# Altium PCB DUTBoard_Sandbox.PcbDoc (part 5 of 6)
Units mil, origin at the board's own origin, x right, y up, seen from the top; angles counter-clockwise.
Board outline 5475 x 5475 mil, 4 copper layers (Top Layer, Mid-Layer 1, Mid-Layer 2, Bottom Layer); 89 components, 507 nets, 1705 pads, 1204 vias.
Unrouted connection lines stored in the file: 6.
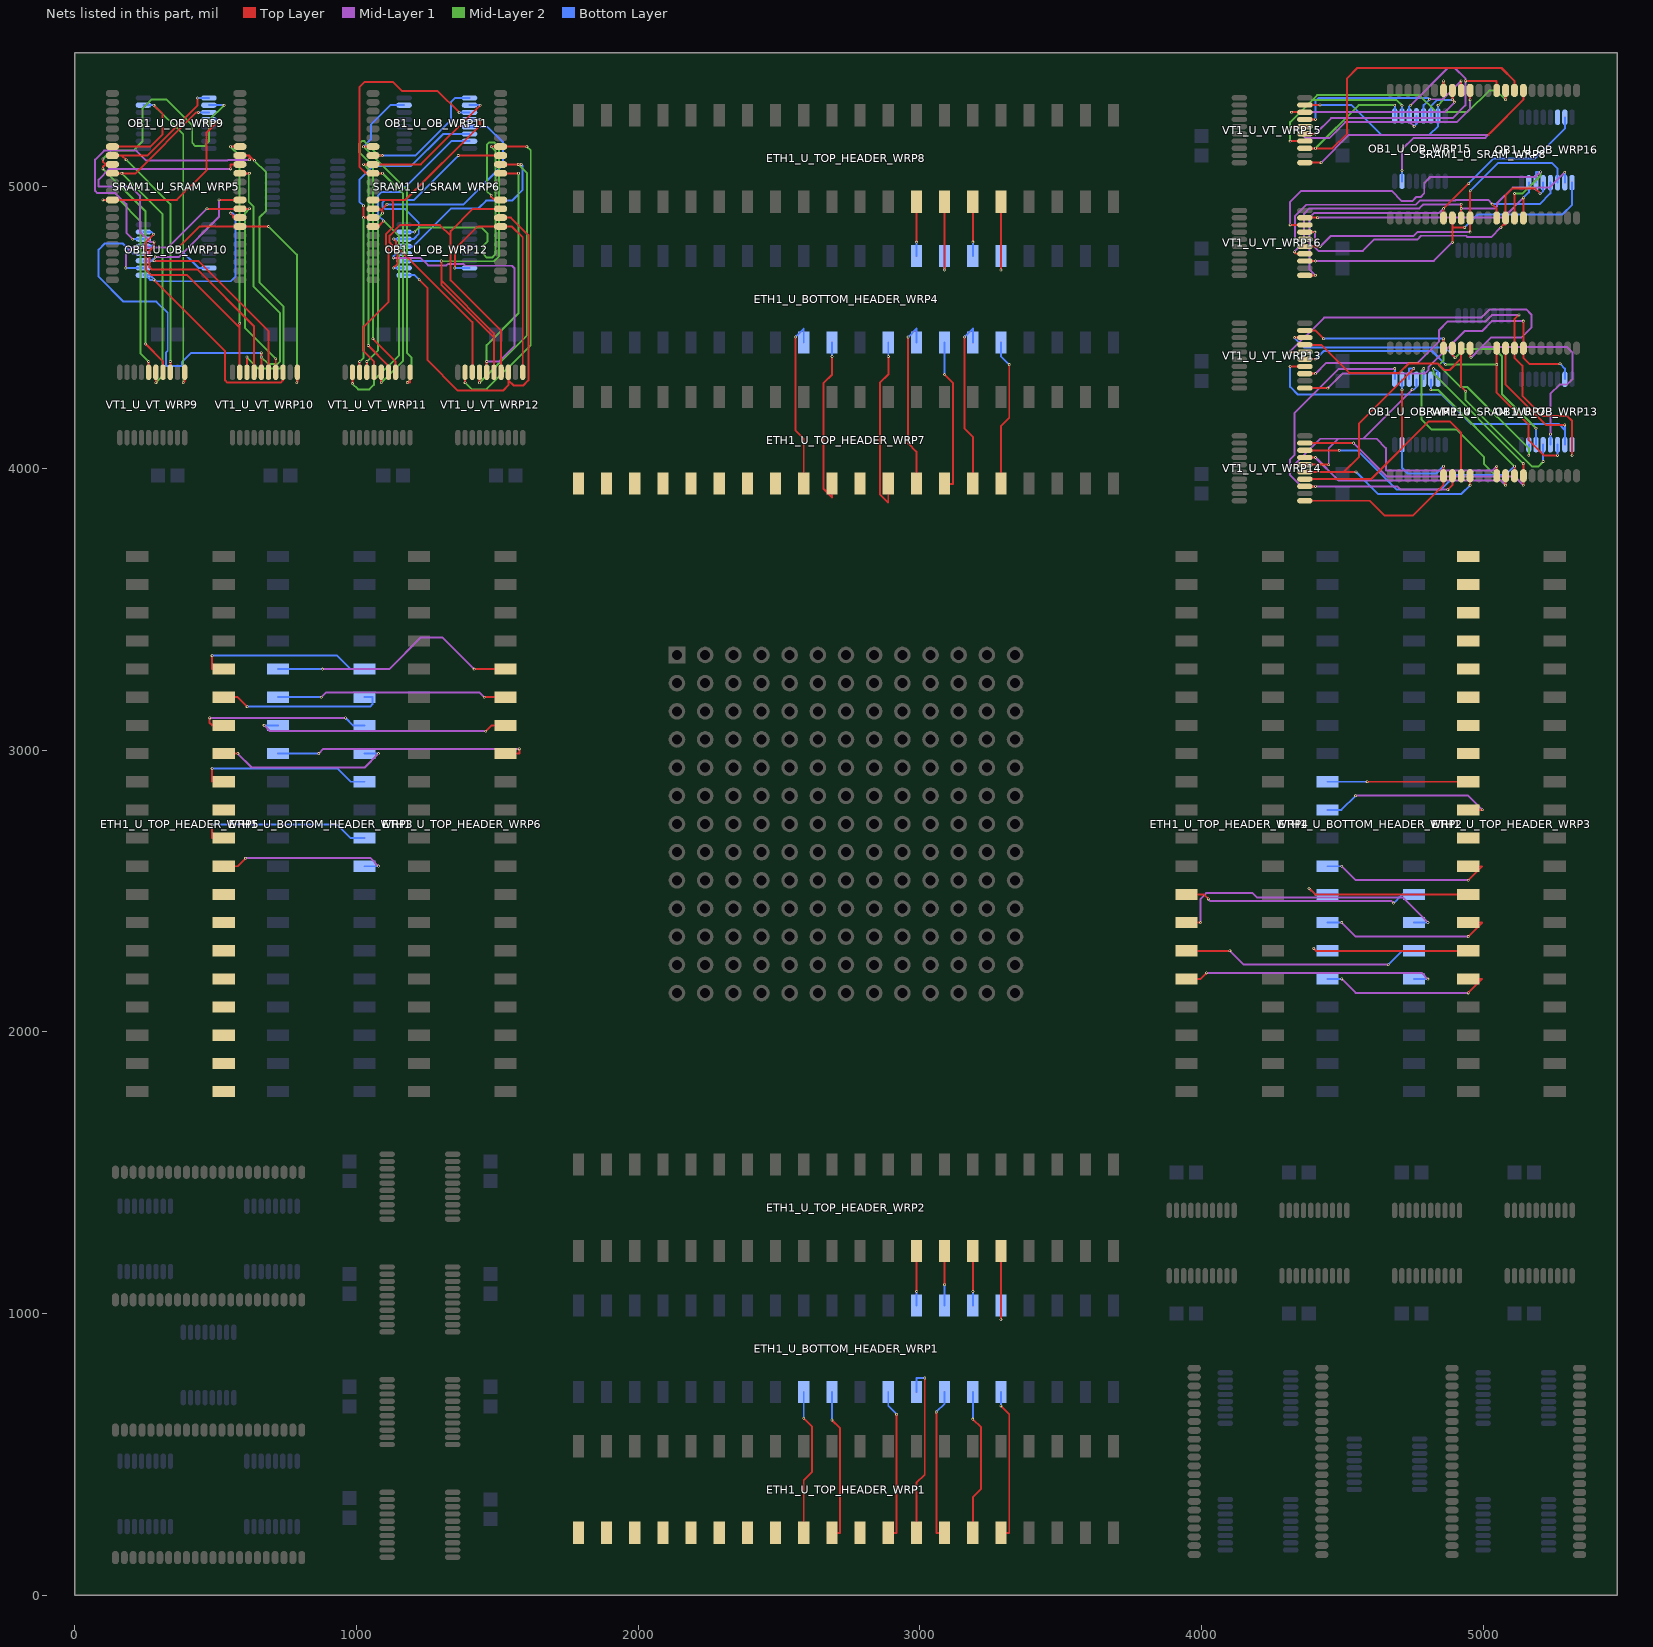
[diagram p7: the nets of this part, all layers, seen from the top]

## Via types
v1: diameter 10, hole 5, Top Layer to Bottom Layer, 1204 vias

## Nets (pads, with @x,y where several pads share a name; then routed paths per layer and width w, separated by ;. In a path a pad name is that pad's centre, name@x,y a point inside that pad or via, vN(x,y) a via of type N, cw(c..) or ccw(c..) an arc to the next point about the centre after c; other vN are vias at no path point) (continued)
INTERNAL12_U_COMBINED_HEADER_WRP1: ETH1_U_BOTTOM_HEADER_WRP1.13 ETH1_U_TOP_HEADER_WRP2.13 | length 193.3
  Top Layer w7: ETH1_U_TOP_HEADER_WRP2.13@2987.5,1221.46 2987.5,1078.5 v1(2988,1078)
  Bottom Layer w7: ETH1_U_BOTTOM_HEADER_WRP1.13@2987.5,1028.54 2987.5,1077.5 v1(2988,1078)
INTERNAL12_U_COMBINED_HEADER_WRP2: ETH1_U_BOTTOM_HEADER_WRP2.13 ETH1_U_TOP_HEADER_WRP4.13 | length 832.6
  Top Layer w7: ETH1_U_TOP_HEADER_WRP4.13@3946.46,2487.5 4007,2487.5 v1(4023,2471.5)
  Mid-Layer 1 w7: v1(4023,2471.5) 4030.5,2464 4674,2464 v1(4681.25,2456.75)
  Bottom Layer w7: v1(4681.25,2456.75) 4712,2487.5 ETH1_U_BOTTOM_HEADER_WRP2.13@4753.54,2487.5
INTERNAL12_U_COMBINED_HEADER_WRP3: ETH1_U_BOTTOM_HEADER_WRP3.13 ETH1_U_TOP_HEADER_WRP6.13 | length 929
  Top Layer w7: ETH1_U_TOP_HEADER_WRP6.13@1528.54,2987.5 1577.5,2987.5 1578,2988 v1(1578,3004)
  Mid-Layer 1 w7: v1(866,2987.5) 882.5,3004 v1(1578,3004)
  Bottom Layer w7: ETH1_U_BOTTOM_HEADER_WRP3.13@721.46,2987.5 v1(866,2987.5)
INTERNAL12_U_COMBINED_HEADER_WRP4: ETH1_U_BOTTOM_HEADER_WRP4.13 ETH1_U_TOP_HEADER_WRP8.13 | length 193.3
  Top Layer w7: ETH1_U_TOP_HEADER_WRP8.13@2987.5,4946.46 2987.5,4803.5 v1(2988,4803)
  Bottom Layer w7: ETH1_U_BOTTOM_HEADER_WRP4.13@2987.5,4753.54 2987.5,4802.5 v1(2988,4803)
INTERNAL13_U_COMBINED_HEADER_WRP1: ETH1_U_BOTTOM_HEADER_WRP1.14 ETH1_U_TOP_HEADER_WRP2.14 | length 192.9
  Top Layer w7: v1(3087.5,1102) ETH1_U_TOP_HEADER_WRP2.14@3087.5,1221.46
  Bottom Layer w7: ETH1_U_BOTTOM_HEADER_WRP1.14@3087.5,1028.54 v1(3087.5,1102)
INTERNAL13_U_COMBINED_HEADER_WRP2: ETH1_U_BOTTOM_HEADER_WRP2.14 ETH1_U_TOP_HEADER_WRP4.14 | length 1042.1
  Top Layer w7: ETH1_U_TOP_HEADER_WRP4.14@3946.46,2387.5 v1(3996,2387.5)
  Mid-Layer 1 w7: v1(3996,2387.5) 3996,2472 4016,2492 4181,2492 4196,2477 4714,2477 v1(4803,2388)
  Bottom Layer w7: ETH1_U_BOTTOM_HEADER_WRP2.14@4753.54,2387.5 4802.5,2387.5 v1(4803,2388)
INTERNAL13_U_COMBINED_HEADER_WRP3: ETH1_U_BOTTOM_HEADER_WRP3.14 ETH1_U_TOP_HEADER_WRP6.14 | length 923.4
  Top Layer w7: v1(1459,3067) 1479.5,3087.5 ETH1_U_TOP_HEADER_WRP6.14@1528.54,3087.5
  Mid-Layer 1 w7: v1(672,3088) 693,3067 v1(1459,3067)
  Bottom Layer w7: v1(672,3088) 672.5,3087.5 ETH1_U_BOTTOM_HEADER_WRP3.14@721.46,3087.5
INTERNAL13_U_COMBINED_HEADER_WRP4: ETH1_U_BOTTOM_HEADER_WRP4.14 ETH1_U_TOP_HEADER_WRP8.14 | length 292
  Top Layer w7: v1(3087.5,4704) ETH1_U_TOP_HEADER_WRP8.14@3087.5,4946.46
  Bottom Layer w7: v1(3087.5,4704) ETH1_U_BOTTOM_HEADER_WRP4.14@3087.5,4753.54
INTERNAL14_U_COMBINED_HEADER_WRP1: ETH1_U_BOTTOM_HEADER_WRP1.15 ETH1_U_TOP_HEADER_WRP2.15 | length 193.3
  Top Layer w7: ETH1_U_TOP_HEADER_WRP2.15@3187.5,1221.46 3187.5,1078.5 v1(3188,1078)
  Bottom Layer w7: ETH1_U_BOTTOM_HEADER_WRP1.15@3187.5,1028.54 3187.5,1077.5 v1(3188,1078)
INTERNAL14_U_COMBINED_HEADER_WRP2: ETH1_U_BOTTOM_HEADER_WRP2.15 ETH1_U_TOP_HEADER_WRP4.15 | length 848.1
  Top Layer w7: ETH1_U_TOP_HEADER_WRP4.15@3946.46,2287.5 v1(4100,2287.5)
  Mid-Layer 1 w7: v1(4100,2287.5) 4149.5,2238 v1(4662.5,2238)
  Bottom Layer w7: v1(4662.5,2238) 4712,2287.5 ETH1_U_BOTTOM_HEADER_WRP2.15@4753.54,2287.5
INTERNAL14_U_COMBINED_HEADER_WRP3: ETH1_U_BOTTOM_HEADER_WRP3.15 ETH1_U_TOP_HEADER_WRP6.15 | length 820.8
  Top Layer w7: v1(1453.5,3187.5) ETH1_U_TOP_HEADER_WRP6.15@1528.54,3187.5
  Mid-Layer 1 w7: v1(875,3187.5) 891.5,3204 1437,3204 v1(1453.5,3187.5)
  Bottom Layer w7: ETH1_U_BOTTOM_HEADER_WRP3.15@721.46,3187.5 v1(875,3187.5)
INTERNAL14_U_COMBINED_HEADER_WRP4: ETH1_U_BOTTOM_HEADER_WRP4.15 ETH1_U_TOP_HEADER_WRP8.15 | length 193.3
  Top Layer w7: ETH1_U_TOP_HEADER_WRP8.15@3187.5,4946.46 3187.5,4803.5 v1(3188,4803)
  Bottom Layer w7: ETH1_U_BOTTOM_HEADER_WRP4.15@3187.5,4753.54 3187.5,4802.5 v1(3188,4803)
INTERNAL15_U_COMBINED_HEADER_WRP1: ETH1_U_BOTTOM_HEADER_WRP1.16 ETH1_U_TOP_HEADER_WRP2.16 | length 292
  Top Layer w7: v1(3287.5,979) ETH1_U_TOP_HEADER_WRP2.16@3287.5,1221.46
  Bottom Layer w7: v1(3287.5,979) ETH1_U_BOTTOM_HEADER_WRP1.16@3287.5,1028.54
INTERNAL15_U_COMBINED_HEADER_WRP2: ETH1_U_BOTTOM_HEADER_WRP2.16 ETH1_U_TOP_HEADER_WRP4.16 | length 924.2
  Top Layer w7: ETH1_U_TOP_HEADER_WRP4.16@3946.46,2187.5 3996,2187.5 v1(4017.5,2209)
  Mid-Layer 1 w7: v1(4017.5,2209) 4781,2209 v1(4803,2187)
  Bottom Layer w7: ETH1_U_BOTTOM_HEADER_WRP2.16@4753.54,2187.5 4802.5,2187.5 v1(4803,2187)
INTERNAL15_U_COMBINED_HEADER_WRP3: ETH1_U_BOTTOM_HEADER_WRP3.16 ETH1_U_TOP_HEADER_WRP6.16 | length 900.3
  Top Layer w7: v1(1417.5,3287.5) ETH1_U_TOP_HEADER_WRP6.16@1528.54,3287.5
  Mid-Layer 1 w7: v1(879,3287.5) 1116.5,3287.5 1229,3400 1305,3400 v1(1417.5,3287.5)
  Bottom Layer w7: ETH1_U_BOTTOM_HEADER_WRP3.16@721.46,3287.5 v1(879,3287.5)
INTERNAL15_U_COMBINED_HEADER_WRP4: ETH1_U_BOTTOM_HEADER_WRP4.16 ETH1_U_TOP_HEADER_WRP8.16 | length 292
  Top Layer w7: v1(3287.5,4704) ETH1_U_TOP_HEADER_WRP8.16@3287.5,4946.46
  Bottom Layer w7: v1(3287.5,4704) ETH1_U_BOTTOM_HEADER_WRP4.16@3287.5,4753.54
INTERNAL16_U_COMBINED_HEADER_WRP1: ETH1_U_TOP_HEADER_WRP1.1
INTERNAL16_U_COMBINED_HEADER_WRP2: ETH1_U_TOP_HEADER_WRP3.1
INTERNAL16_U_COMBINED_HEADER_WRP3: ETH1_U_TOP_HEADER_WRP5.1
INTERNAL16_U_COMBINED_HEADER_WRP4: ETH1_U_TOP_HEADER_WRP7.1
INTERNAL17_U_COMBINED_HEADER_WRP1: ETH1_U_TOP_HEADER_WRP1.2
INTERNAL17_U_COMBINED_HEADER_WRP2: ETH1_U_TOP_HEADER_WRP3.2
INTERNAL17_U_COMBINED_HEADER_WRP3: ETH1_U_TOP_HEADER_WRP5.2
INTERNAL17_U_COMBINED_HEADER_WRP4: ETH1_U_TOP_HEADER_WRP7.2
INTERNAL18_U_COMBINED_HEADER_WRP1: ETH1_U_TOP_HEADER_WRP1.3
INTERNAL18_U_COMBINED_HEADER_WRP2: ETH1_U_TOP_HEADER_WRP3.3
INTERNAL18_U_COMBINED_HEADER_WRP3: ETH1_U_TOP_HEADER_WRP5.3
INTERNAL18_U_COMBINED_HEADER_WRP4: ETH1_U_TOP_HEADER_WRP7.3
INTERNAL19_U_COMBINED_HEADER_WRP1: ETH1_U_TOP_HEADER_WRP1.4
INTERNAL19_U_COMBINED_HEADER_WRP2: ETH1_U_TOP_HEADER_WRP3.4
INTERNAL19_U_COMBINED_HEADER_WRP3: ETH1_U_TOP_HEADER_WRP5.4
INTERNAL19_U_COMBINED_HEADER_WRP4: ETH1_U_TOP_HEADER_WRP7.4
INTERNAL20_U_COMBINED_HEADER_WRP1: ETH1_U_TOP_HEADER_WRP1.5
INTERNAL20_U_COMBINED_HEADER_WRP2: ETH1_U_TOP_HEADER_WRP3.5
INTERNAL20_U_COMBINED_HEADER_WRP3: ETH1_U_TOP_HEADER_WRP5.5
INTERNAL20_U_COMBINED_HEADER_WRP4: ETH1_U_TOP_HEADER_WRP7.5
INTERNAL21_U_COMBINED_HEADER_WRP1: ETH1_U_TOP_HEADER_WRP1.6
INTERNAL21_U_COMBINED_HEADER_WRP2: ETH1_U_TOP_HEADER_WRP3.6
INTERNAL21_U_COMBINED_HEADER_WRP3: ETH1_U_TOP_HEADER_WRP5.6
INTERNAL21_U_COMBINED_HEADER_WRP4: ETH1_U_TOP_HEADER_WRP7.6
INTERNAL22_U_COMBINED_HEADER_WRP1: ETH1_U_TOP_HEADER_WRP1.7
INTERNAL22_U_COMBINED_HEADER_WRP2: ETH1_U_TOP_HEADER_WRP3.7
INTERNAL22_U_COMBINED_HEADER_WRP3: ETH1_U_TOP_HEADER_WRP5.7
INTERNAL22_U_COMBINED_HEADER_WRP4: ETH1_U_TOP_HEADER_WRP7.7
INTERNAL23_U_COMBINED_HEADER_WRP1: ETH1_U_TOP_HEADER_WRP1.8
INTERNAL23_U_COMBINED_HEADER_WRP2: ETH1_U_TOP_HEADER_WRP3.8
INTERNAL23_U_COMBINED_HEADER_WRP3: ETH1_U_TOP_HEADER_WRP5.8
INTERNAL23_U_COMBINED_HEADER_WRP4: ETH1_U_TOP_HEADER_WRP7.8
INTERNAL24_U_COMBINED_HEADER_WRP1: ETH1_U_BOTTOM_HEADER_WRP1.32 ETH1_U_TOP_HEADER_WRP1.9 | length 524.4
  Top Layer w7: ETH1_U_TOP_HEADER_WRP1.9@2587.5,221.46 2587.5,408.5 2617,438 2617,598.5 v1(2587.5,628)
  Bottom Layer w7: v1(2587.5,628) ETH1_U_BOTTOM_HEADER_WRP1.32@2587.5,721.46
INTERNAL24_U_COMBINED_HEADER_WRP2: ETH1_U_BOTTOM_HEADER_WRP2.32 ETH1_U_TOP_HEADER_WRP3.9 | length 500
  Top Layer w7: v1(4587,2887.5) ETH1_U_TOP_HEADER_WRP3.9@4946.46,2887.5
  Bottom Layer w7: ETH1_U_BOTTOM_HEADER_WRP2.32@4446.46,2887.5 v1(4587,2887.5)
INTERNAL24_U_COMBINED_HEADER_WRP3: ETH1_U_BOTTOM_HEADER_WRP3.32 ETH1_U_TOP_HEADER_WRP5.9 | length 622.5
  Top Layer w7: ETH1_U_TOP_HEADER_WRP5.9@528.54,2587.5 578,2587.5 v1(606.5,2616)
  Mid-Layer 1 w7: v1(606.5,2616) 1050,2616 v1(1078,2588)
  Bottom Layer w7: ETH1_U_BOTTOM_HEADER_WRP3.32@1028.54,2587.5 1077.5,2587.5 v1(1078,2588)
INTERNAL24_U_COMBINED_HEADER_WRP4: ETH1_U_BOTTOM_HEADER_WRP4.32 ETH1_U_TOP_HEADER_WRP7.9 | length 622.5
  Top Layer w7: v1(2558,4466) 2558,4134.5 2587.5,4105 ETH1_U_TOP_HEADER_WRP7.9@2587.5,3946.46
  Bottom Layer w7: v1(2558,4466) 2587.5,4495.5 ETH1_U_BOTTOM_HEADER_WRP4.32@2587.5,4446.46
INTERNAL25_U_COMBINED_HEADER_WRP1: ETH1_U_BOTTOM_HEADER_WRP1.31 ETH1_U_TOP_HEADER_WRP1.10 | length 542.6
  Top Layer w7: ETH1_U_TOP_HEADER_WRP1.10@2687.5,221.46 2687.5,221 2717,221 2717,592.5 v1(2687.5,622)
  Bottom Layer w7: v1(2687.5,622) ETH1_U_BOTTOM_HEADER_WRP1.31@2687.5,721.46
INTERNAL25_U_COMBINED_HEADER_WRP2: ETH1_U_BOTTOM_HEADER_WRP2.31 ETH1_U_TOP_HEADER_WRP3.10 | length 640.9
  Top Layer w7: ETH1_U_TOP_HEADER_WRP3.10@4946.46,2787.5 4995.5,2787.5 v1(4996,2788)
  Mid-Layer 1 w7: v1(4546.5,2838) 4946,2838 v1(4996,2788)
  Bottom Layer w7: ETH1_U_BOTTOM_HEADER_WRP2.31@4446.46,2787.5 4496,2787.5 v1(4546.5,2838)
INTERNAL25_U_COMBINED_HEADER_WRP3: ETH1_U_BOTTOM_HEADER_WRP3.31 ETH1_U_TOP_HEADER_WRP5.10 | length 649.3
  Top Layer w7: v1(487.5,2735) 487.5,2687.5 ETH1_U_TOP_HEADER_WRP5.10@528.54,2687.5
  Bottom Layer w7: v1(487.5,2735) 931.5,2735 979,2687.5 ETH1_U_BOTTOM_HEADER_WRP3.31@1028.54,2687.5
INTERNAL25_U_COMBINED_HEADER_WRP4: ETH1_U_BOTTOM_HEADER_WRP4.31 ETH1_U_TOP_HEADER_WRP7.10 | length 623.6
  Top Layer w7: ETH1_U_TOP_HEADER_WRP7.10@2687.5,3946.46 2687.5,3897.09 2658,3926.59 2658,4303 2688,4333 v1(2688,4397)
  Bottom Layer w7: ETH1_U_BOTTOM_HEADER_WRP4.31@2687.5,4446.46 2687.5,4397.5 v1(2688,4397)
INTERNAL26_U_COMBINED_HEADER_WRP1: ETH1_U_TOP_HEADER_WRP1.11
INTERNAL26_U_COMBINED_HEADER_WRP2: ETH1_U_TOP_HEADER_WRP3.11
INTERNAL26_U_COMBINED_HEADER_WRP3: ETH1_U_TOP_HEADER_WRP5.11
INTERNAL26_U_COMBINED_HEADER_WRP4: ETH1_U_TOP_HEADER_WRP7.11
INTERNAL27_U_COMBINED_HEADER_WRP1: ETH1_U_BOTTOM_HEADER_WRP1.29 ETH1_U_TOP_HEADER_WRP1.12 | length 542.6
  Top Layer w7: ETH1_U_TOP_HEADER_WRP1.12@2887.5,221.46 2887.5,221 2917,221 v1(2917,642.5)
  Bottom Layer w7: ETH1_U_BOTTOM_HEADER_WRP1.29@2887.5,721.46 2887.5,672 v1(2917,642.5)
INTERNAL27_U_COMBINED_HEADER_WRP2: ETH1_U_BOTTOM_HEADER_WRP2.29 ETH1_U_TOP_HEADER_WRP3.12 | length 639.1
  Top Layer w7: v1(4946,2538) 4995.5,2587.5 ETH1_U_TOP_HEADER_WRP3.12@4946.46,2587.5
  Mid-Layer 1 w7: v1(4497,2587.5) 4546.5,2538 v1(4946,2538)
  Bottom Layer w7: ETH1_U_BOTTOM_HEADER_WRP2.29@4446.46,2587.5 v1(4497,2587.5)
INTERNAL27_U_COMBINED_HEADER_WRP3: ETH1_U_BOTTOM_HEADER_WRP3.29 ETH1_U_TOP_HEADER_WRP5.12 | length 649.3
  Top Layer w7: v1(487.5,2935) 487.5,2887.5 ETH1_U_TOP_HEADER_WRP5.12@528.54,2887.5
  Bottom Layer w7: v1(487.5,2935) 931.5,2935 979,2887.5 ETH1_U_BOTTOM_HEADER_WRP3.29@1028.54,2887.5
INTERNAL27_U_COMBINED_HEADER_WRP4: ETH1_U_BOTTOM_HEADER_WRP4.29 ETH1_U_TOP_HEADER_WRP7.12 | length 661.6
  Top Layer w7: ETH1_U_TOP_HEADER_WRP7.12@2887.5,3946.46 2887.5,3878.09 2858,3907.59 2858,4303 2888,4333 v1(2888,4397)
  Bottom Layer w7: ETH1_U_BOTTOM_HEADER_WRP4.29@2887.5,4446.46 2887.5,4397.5 v1(2888,4397)
INTERNAL28_U_COMBINED_HEADER_WRP1: ETH1_U_BOTTOM_HEADER_WRP1.28 ETH1_U_TOP_HEADER_WRP1.13 | length 640.8
  Top Layer w7: ETH1_U_TOP_HEADER_WRP1.13@2987.5,221.46 2987.5,398.5 3017,428 v1(3017,771)
  Bottom Layer w7: ETH1_U_BOTTOM_HEADER_WRP1.28@2987.5,721.46 2987.5,771 v1(3017,771)
INTERNAL28_U_COMBINED_HEADER_WRP2: ETH1_U_BOTTOM_HEADER_WRP2.28 ETH1_U_TOP_HEADER_WRP3.13 | length 648.7
  Top Layer w7: v1(4381,2509) 4402.5,2487.5 ETH1_U_TOP_HEADER_WRP3.13@4946.46,2487.5
  Bottom Layer w7: v1(4381,2509) 4402.5,2487.5 ETH1_U_BOTTOM_HEADER_WRP2.28@4446.46,2487.5
INTERNAL28_U_COMBINED_HEADER_WRP3: ETH1_U_BOTTOM_HEADER_WRP3.28 ETH1_U_TOP_HEADER_WRP5.13 | length 639.9
  Top Layer w7: ETH1_U_TOP_HEADER_WRP5.13@528.54,2987.5 v1(579,2987.5)
  Mid-Layer 1 w7: v1(579,2987.5) 628.5,2938 1028.5,2938 v1(1078,2987.5)
  Bottom Layer w7: ETH1_U_BOTTOM_HEADER_WRP3.28@1028.54,2987.5 v1(1078,2987.5)
INTERNAL28_U_COMBINED_HEADER_WRP4: ETH1_U_BOTTOM_HEADER_WRP4.28 ETH1_U_TOP_HEADER_WRP7.13 | length 622.5
  Top Layer w7: v1(2958,4466) 2958,4088.5 2987.5,4059 ETH1_U_TOP_HEADER_WRP7.13@2987.5,3946.46
  Bottom Layer w7: v1(2958,4466) 2987.5,4495.5 ETH1_U_BOTTOM_HEADER_WRP4.28@2987.5,4446.46
INTERNAL29_U_COMBINED_HEADER_WRP1: ETH1_U_BOTTOM_HEADER_WRP1.27 ETH1_U_TOP_HEADER_WRP1.14 | length 542.6
  Top Layer w7: v1(3058,650.5) 3058,221 3087.5,221 ETH1_U_TOP_HEADER_WRP1.14@3087.5,221.46
  Bottom Layer w7: v1(3058,650.5) 3087.5,680 ETH1_U_BOTTOM_HEADER_WRP1.27@3087.5,721.46
INTERNAL29_U_COMBINED_HEADER_WRP2: ETH1_U_BOTTOM_HEADER_WRP2.27 ETH1_U_TOP_HEADER_WRP3.14 | length 639.1
  Top Layer w7: v1(4946,2338) 4995.5,2387.5 ETH1_U_TOP_HEADER_WRP3.14@4946.46,2387.5
  Mid-Layer 1 w7: v1(4497,2387.5) 4546.5,2338 v1(4946,2338)
  Bottom Layer w7: ETH1_U_BOTTOM_HEADER_WRP2.27@4446.46,2387.5 v1(4497,2387.5)
INTERNAL29_U_COMBINED_HEADER_WRP3: ETH1_U_BOTTOM_HEADER_WRP3.27 ETH1_U_TOP_HEADER_WRP5.14 | length 631.6
  Top Layer w7: v1(479,3114) 479,3096 487.5,3087.5 ETH1_U_TOP_HEADER_WRP5.14@528.54,3087.5
  Mid-Layer 1 w7: v1(479,3114) v1(961,3114)
  Bottom Layer w7: v1(961,3114) 987.5,3087.5 ETH1_U_BOTTOM_HEADER_WRP3.27@1028.54,3087.5
INTERNAL29_U_COMBINED_HEADER_WRP4: ETH1_U_BOTTOM_HEADER_WRP4.27 ETH1_U_TOP_HEADER_WRP7.14 | length 544.4
  Top Layer w7: ETH1_U_TOP_HEADER_WRP7.14@3087.5,3946.46 3087.5,3945.14 3117,3945.14 3117,4303 v1(3087.5,4332.5)
  Bottom Layer w7: v1(3087.5,4332.5) ETH1_U_BOTTOM_HEADER_WRP4.27@3087.5,4446.46
INTERNAL30_U_COMBINED_HEADER_WRP1: ETH1_U_BOTTOM_HEADER_WRP1.26 ETH1_U_TOP_HEADER_WRP1.15 | length 524.4
  Top Layer w7: ETH1_U_TOP_HEADER_WRP1.15@3187.5,221.46 3187.5,348.5 3217,378 3217,595.5 v1(3187.5,625)
  Bottom Layer w7: v1(3187.5,625) ETH1_U_BOTTOM_HEADER_WRP1.26@3187.5,721.46
INTERNAL30_U_COMBINED_HEADER_WRP2: ETH1_U_BOTTOM_HEADER_WRP2.26 ETH1_U_TOP_HEADER_WRP3.15 | length 605
  Top Layer w7: v1(4397.5,2296) 4406,2287.5 ETH1_U_TOP_HEADER_WRP3.15@4946.46,2287.5
  Bottom Layer w7: v1(4397.5,2296) 4406,2287.5 ETH1_U_BOTTOM_HEADER_WRP2.26@4446.46,2287.5
INTERNAL30_U_COMBINED_HEADER_WRP3: ETH1_U_BOTTOM_HEADER_WRP3.26 ETH1_U_TOP_HEADER_WRP5.15 | length 597.6
  Top Layer w7: ETH1_U_TOP_HEADER_WRP5.15@528.54,3187.5 578,3187.5 v1(611.5,3154)
  Bottom Layer w7: v1(611.5,3154) 1048,3154 1056,3162 1056,3187.5 ETH1_U_BOTTOM_HEADER_WRP3.26@1028.54,3187.5
INTERNAL30_U_COMBINED_HEADER_WRP4: ETH1_U_BOTTOM_HEADER_WRP4.26 ETH1_U_TOP_HEADER_WRP7.15 | length 622.5
  Top Layer w7: v1(3158,4466) 3158,4141.5 3187.5,4112 ETH1_U_TOP_HEADER_WRP7.15@3187.5,3946.46
  Bottom Layer w7: v1(3158,4466) 3187.5,4495.5 ETH1_U_BOTTOM_HEADER_WRP4.26@3187.5,4446.46
INTERNAL31_U_COMBINED_HEADER_WRP1: ETH1_U_BOTTOM_HEADER_WRP1.25 ETH1_U_TOP_HEADER_WRP1.16 | length 542.6
  Top Layer w7: ETH1_U_TOP_HEADER_WRP1.16@3287.5,221.46 3287.5,221 3317,221 3317,642.5 v1(3287.5,672)
  Bottom Layer w7: v1(3287.5,672) ETH1_U_BOTTOM_HEADER_WRP1.25@3287.5,721.46
INTERNAL31_U_COMBINED_HEADER_WRP2: ETH1_U_BOTTOM_HEADER_WRP2.25 ETH1_U_TOP_HEADER_WRP3.16 | length 639.1
  Top Layer w7: v1(4946,2138) 4995.5,2187.5 ETH1_U_TOP_HEADER_WRP3.16@4946.46,2187.5
  Mid-Layer 1 w7: v1(4497,2187.5) 4546.5,2138 v1(4946,2138)
  Bottom Layer w7: ETH1_U_BOTTOM_HEADER_WRP2.25@4446.46,2187.5 v1(4497,2187.5)
INTERNAL31_U_COMBINED_HEADER_WRP3: ETH1_U_BOTTOM_HEADER_WRP3.25 ETH1_U_TOP_HEADER_WRP5.16 | length 649.3
  Top Layer w7: v1(487.5,3335) 487.5,3287.5 ETH1_U_TOP_HEADER_WRP5.16@528.54,3287.5
  Bottom Layer w7: v1(487.5,3335) 931.5,3335 979,3287.5 ETH1_U_BOTTOM_HEADER_WRP3.25@1028.54,3287.5
INTERNAL31_U_COMBINED_HEADER_WRP4: ETH1_U_BOTTOM_HEADER_WRP4.25 ETH1_U_TOP_HEADER_WRP7.16 | length 524.4
  Top Layer w7: ETH1_U_TOP_HEADER_WRP7.16@3287.5,3946.46 3287.5,4149.5 3317,4179 v1(3317,4368)
  Bottom Layer w7: ETH1_U_BOTTOM_HEADER_WRP4.25@3287.5,4446.46 3287.5,4397.5 v1(3317,4368)
NetOB1_U_OB_WRP16_DS: OB1_U_OB_WRP16.DS
OB_D_B0: OB1_U_OB_WRP16.D0 SRAM1_U_SRAM_WRP8.DATA0 VT1_U_VT_WRP16.OVL0 | length 1361.3
  Top Layer w7: VT1_U_VT_WRP16.OVL0@4366.14,4684.84 4403.68,4684.84 v1(4403.84,4685) ; SRAM1_U_SRAM_WRP8.DATA0@4858.27,4888.62 v1(4858.27,4922) v1(4948,5011.46)
  Mid-Layer 1 w7: v1(4403.84,4685) 4383.49,4705.36 4383.49,4890.49 4400,4907 4843.27,4907 v1(4858.27,4922)
  Bottom Layer w7: v1(4948,5011.46) 5035.54,5099 5181.98,5099 5288.98,5206 OB1_U_OB_WRP16.D0@5288.98,5246.14
OB_D_B1: OB1_U_OB_WRP16.D1 SRAM1_U_SRAM_WRP8.DATA1 VT1_U_VT_WRP16.OVL1 | length 1173.9
  Top Layer w7: VT1_U_VT_WRP16.OVL1@4366.14,4736.02 v1(4404,4736.02) ; v1(4889.76,4802) 4889.76,4855.24 ; SRAM1_U_SRAM_WRP8.DATA1@4889.76,4888.62 4889.76,4855.24 ; v1(4933.84,4855) 4890,4855 4889.76,4855.24
  Mid-Layer 1 w7: v1(4404,4736.02) 4823.79,4736.02 v1(4889.76,4802)
  Bottom Layer w7: v1(4933.84,4855) 4979.84,4901 5279.57,4901 5314.57,4936 OB1_U_OB_WRP16.D1@5314.57,5013.86
OB_D_B2: OB1_U_OB_WRP16.D2 SRAM1_U_SRAM_WRP8.DATA2 VT1_U_VT_WRP16.OVL2 | length 1273.8
  Top Layer w7: v1(4329,4768) 4335.39,4761.61 VT1_U_VT_WRP16.OVL2@4366.14,4761.61 ; SRAM1_U_SRAM_WRP8.DATA2@4921.26,4888.62 v1(4921.26,4922) v1(4921.26,4937)
  Mid-Layer 1 w7: v1(4329,4768) 4364,4803 4364,4904 4382.5,4922.5 4772.78,4922.5 4787.28,4937 v1(4921.26,4937) ; v1(4921.26,4922) 5040,4922 5048,4930 5048,4940 5104,4996 5234,4996 v1(5289,5051)
  Bottom Layer w7: OB1_U_OB_WRP16.D2@5288.98,5013.86 v1(5289,5051)
OB_D_B3: OB1_U_OB_WRP16.D3 SRAM1_U_SRAM_WRP8.DATA3 VT1_U_VT_WRP16.OVL3 | length 1163.5
  Top Layer w7: VT1_U_VT_WRP16.OVL3@4366.14,4787.2 v1(4420,4787.2) ; v1(4952.76,4838.5) SRAM1_U_SRAM_WRP8.DATA3@4952.76,4888.62 4952.76,4984.76 v1(4953,4985)
  Mid-Layer 1 w7: v1(4420,4787.2) 4457.3,4824.5 4751.5,4824.5 4765.5,4838.5 v1(4952.76,4838.5)
  Bottom Layer w7: v1(4953,4985) 5051,5083 5244.39,5083 5263.39,5064 OB1_U_OB_WRP16.D3@5263.39,5013.86
OB_D_B4: OB1_U_OB_WRP16.D4 SRAM1_U_SRAM_WRP8.DATA4 VT1_U_VT_WRP16.OVL4 | length 1164.2
  Top Layer w7: v1(4330.43,4814.43) 4332.06,4812.8 VT1_U_VT_WRP16.OVL4@4366.14,4812.8 ; v1(5031,4938) 5047.24,4921.76 SRAM1_U_SRAM_WRP8.DATA4@5047.24,4888.62
  Mid-Layer 1 w7: v1(4330.43,4814.43) 4330.43,4895.43 4370.5,4935.5 4759.78,4935.5 4774.28,4950 4900.07,4950 4902.57,4952.5 5016.5,4952.5 v1(5031,4938)
  Bottom Layer w7: v1(5031,4938) 5200,4938 5237.8,4975.8 OB1_U_OB_WRP16.D4@5237.8,5013.86
OB_D_B5: OB1_U_OB_WRP16.D5 SRAM1_U_SRAM_WRP8.DATA5 VT1_U_VT_WRP16.OVL5 | length 1101.7
  Top Layer w7: VT1_U_VT_WRP16.OVL5@4366.14,4838.39 v1(4402,4838.39) ; v1(5062,4855) 5073,4866 5078.74,4866 SRAM1_U_SRAM_WRP8.DATA5@5078.74,4888.62 5078.74,4969.74 5102,4993 5184,4993 v1(5201,4976)
  Mid-Layer 1 w7: v1(4402,4838.39) 4402,4784 4414,4772 4572,4772 4611.5,4811.5 4764.5,4811.5 4778.5,4825.5 4939,4825.5 4943.5,4821 5028,4821 v1(5062,4855)
  Bottom Layer w7: v1(5201,4976) 5204.2,4976 5212.2,4984 OB1_U_OB_WRP16.D5@5212.2,5013.86
OB_D_B6: OB1_U_OB_WRP16.D6 SRAM1_U_SRAM_WRP8.DATA6 VT1_U_VT_WRP16.OVL6 | length 1390.8
  Top Layer w7: v1(4314,4863.98) VT1_U_VT_WRP16.OVL6@4366.14,4863.98 ; SRAM1_U_SRAM_WRP8.DATA6@5110.24,4888.62 v1(5110.24,4975.62)
  Mid-Layer 1 w7: v1(4314,4863.98) 4314,4946 4353,4985 4674,4985 4710.5,4948.5 4746.78,4948.5 4761.28,4963 4777,4963 4790,4976 4790,5012 4812,5034 5184.61,5034 v1(5202.61,5052)
  Mid-Layer 2 w7: v1(5110.24,4975.62) 5139.35,4975.62 5202.61,5038.89 v1(5202.61,5052)
  Bottom Layer w7: OB1_U_OB_WRP16.D6@5186.61,5013.86 5186.61,5052 v1(5202.61,5052)
OB_D_B7: OB1_U_OB_WRP16.D7 SRAM1_U_SRAM_WRP8.DATA7 VT1_U_VT_WRP16.OVL7 | length 938
  Top Layer w7: VT1_U_VT_WRP16.OVL7@4366.14,4889.57 v1(4411.43,4889.57) ; SRAM1_U_SRAM_WRP8.DATA7@5141.73,4888.62 v1(5141.73,4960)
  Mid-Layer 1 w7: v1(4411.43,4889.57) 5071.3,4889.57 v1(5141.73,4960)
  Bottom Layer w7: v1(5141.73,4960) 5161.02,4979.29 OB1_U_OB_WRP16.D7@5161.02,5013.86
OB_D_B8: OB1_U_OB_WRP15.D0 SRAM1_U_SRAM_WRP8.DATA8 VT1_U_VT_WRP15.OVL0 | length 1342.4
  Top Layer w7: VT1_U_VT_WRP15.OVL0@4366.14,5084.84 v1(4424,5084.84) ; 5017.5,5183.5 5027,5193 5141.73,5308.27 SRAM1_U_SRAM_WRP8.DATA8@5141.73,5341.38
  Mid-Layer 1 w7: v1(4424,5084.84) 4522.66,5183.5 5017.5,5183.5 5007.02,5173.02 4752,5173.02 4711.02,5132.05 v1(4711.02,5057)
  Bottom Layer w7: OB1_U_OB_WRP15.D0@4711.02,5018.86 v1(4711.02,5057)
OB_D_B9: OB1_U_OB_WRP15.D1 SRAM1_U_SRAM_WRP8.DATA9 VT1_U_VT_WRP15.OVL1 | length 1412.3
  Top Layer w7: VT1_U_VT_WRP15.OVL1@4366.14,5136.02 v1(4404,5136) 4464,5136.02 4516,5188.02 4516,5384 4553,5421 5064.24,5421 5110.24,5375 SRAM1_U_SRAM_WRP8.DATA9@5110.24,5341.38
  Mid-Layer 2 w7: v1(4404,5136) 4557,5289 v1(4685.43,5289)
  Bottom Layer w7: OB1_U_OB_WRP15.D1@4685.43,5251.14 v1(4685.43,5289)
OB_D_B10: OB1_U_OB_WRP15.D2 SRAM1_U_SRAM_WRP8.DATA10 VT1_U_VT_WRP15.OVL2 | length 1391.2
  Top Layer w7: v1(4314,5161.61) VT1_U_VT_WRP15.OVL2@4366.14,5161.61 ; v1(5078.74,5308) SRAM1_U_SRAM_WRP8.DATA10@5078.74,5341.38
  Mid-Layer 2 w7: v1(4314,5161.61) 4314,5229 4392,5307 ; v1(4711.02,5288) 4692.02,5307 4392,5307 ; v1(5078.74,5308) 5045.74,5341 5020,5341 4944,5265 4832,5265 4772,5325 4410,5325 4392,5307
  Bottom Layer w7: OB1_U_OB_WRP15.D2@4711.02,5251.14 v1(4711.02,5288)
OB_D_B11: OB1_U_OB_WRP15.D3 SRAM1_U_SRAM_WRP8.DATA11 VT1_U_VT_WRP15.OVL3 | length 1243
  Top Layer w7: VT1_U_VT_WRP15.OVL3@4366.14,5187.2 v1(4404,5187.2) ; v1(4937,5375) 5047.24,5375 SRAM1_U_SRAM_WRP8.DATA11@5047.24,5341.38
  Mid-Layer 1 w7: v1(4404,5187.2) 4459.8,5243 4891,5243 4936,5288 ; v1(4742,5289) 4874,5421 4899,5421 4936,5384 4936,5288 ; v1(4937,5375) 4937,5289 4936,5288
  Bottom Layer w7: OB1_U_OB_WRP15.D3@4736.61,5251.14 4736.61,5283.61 v1(4742,5289)
OB_D_B12: OB1_U_OB_WRP15.D4 SRAM1_U_SRAM_WRP8.DATA12 VT1_U_VT_WRP15.OVL4 | length 848.3
  Top Layer w7: v1(4329,5213) 4329.2,5212.8 VT1_U_VT_WRP15.OVL4@4366.14,5212.8 ; v1(4952.76,5307.76) SRAM1_U_SRAM_WRP8.DATA12@4952.76,5341.38
  Mid-Layer 1 w7: v1(4329,5213) 4370,5172 4452,5172 4509,5229 4739,5229 ; v1(4754,5214) 4739,5229 ; v1(4952.76,5307.76) 4952.76,5275.76 4906,5229 4739,5229
  Bottom Layer w7: v1(4754,5214) 4762.2,5222.2 OB1_U_OB_WRP15.D4@4762.2,5251.14
OB_D_B13: OB1_U_OB_WRP15.D5 SRAM1_U_SRAM_WRP8.DATA13 VT1_U_VT_WRP15.OVL5 | length 755.4
  Top Layer w7: VT1_U_VT_WRP15.OVL5@4366.14,5238.39 v1(4404,5238.39) ; v1(4921,5375) 4921.26,5374.74 SRAM1_U_SRAM_WRP8.DATA13@4921.26,5341.38
  Mid-Layer 1 w7: v1(4809,5310) 4856,5310 v1(4921,5375)
  Bottom Layer w7: v1(4404,5238.39) 4404,5304 4415,5315 4804,5315 v1(4809,5310) 4787.8,5288.8 OB1_U_OB_WRP15.D5@4787.8,5251.14
OB_D_B14: OB1_U_OB_WRP15.D6 SRAM1_U_SRAM_WRP8.DATA14 VT1_U_VT_WRP15.OVL6 | length 805.5
  Top Layer w7: v1(4319,5263.98) VT1_U_VT_WRP15.OVL6@4366.14,5263.98 ; SRAM1_U_SRAM_WRP8.DATA14@4889.76,5341.38 v1(4889.76,5308) v1(4897.88,5299.88)
  Mid-Layer 1 w7: v1(4319,5263.98) 4861.98,5263.98 v1(4897.88,5299.88)
  Bottom Layer w7: OB1_U_OB_WRP15.D6@4813.39,5251.14 4813.39,5285 4836.39,5308 v1(4889.76,5308)
OB_D_B15: OB1_U_OB_WRP15.D7 SRAM1_U_SRAM_WRP8.DATA15 VT1_U_VT_WRP15.OVL7 | length 732.4
  Top Layer w7: VT1_U_VT_WRP15.OVL7@4366.14,5289.57 4419.57,5289.57 v1(4420,5290) ; SRAM1_U_SRAM_WRP8.DATA15@4858.27,5341.38 v1(4858.27,5375)
  Mid-Layer 2 w7: v1(4839,5289) 4858.27,5308.27 v1(4858.27,5375)
  Bottom Layer w7: v1(4420,5290) 4531,5290 4637.5,5183.5 4808.48,5183.5 4838.98,5214 OB1_U_OB_WRP15.D7@4838.98,5251.14 v1(4839,5289)
OB_D_B16: OB1_U_OB_WRP14.D0 SRAM1_U_SRAM_WRP7.DATA0 VT1_U_VT_WRP14.OVL0 | length 874.4
  Top Layer w7: VT1_U_VT_WRP14.OVL0@4366.14,3884.84 4597.16,3884.84 4650.28,3831.72 4749.98,3831.72 4858.27,3940 SRAM1_U_SRAM_WRP7.DATA0@4858.27,3973.62 v1(4858.27,4007.24)
  Bottom Layer w7: OB1_U_OB_WRP14.D0@4711.02,4083.86 4711.02,4001.98 4731.39,3981.61 4832.64,3981.61 v1(4858.27,4007.24)
OB_D_B17: OB1_U_OB_WRP14.D1 SRAM1_U_SRAM_WRP7.DATA1 VT1_U_VT_WRP14.OVL1 | length 1360.8
  Top Layer w7: VT1_U_VT_WRP14.OVL1@4366.14,3936.02 v1(4404,3936) ; v1(4873.76,3924) 4889.76,3940 SRAM1_U_SRAM_WRP7.DATA1@4889.76,3973.62
  Mid-Layer 1 w7: v1(4685.43,4354) 4684.43,4353 4487,4353 4329,4195 4329,4047 4314,4032 4314,3976 4354,3936 v1(4404,3936) 4694,3936 4706,3924 v1(4873.76,3924)
  Bottom Layer w7: OB1_U_OB_WRP14.D1@4685.43,4316.14 v1(4685.43,4354)
OB_D_B18: OB1_U_OB_WRP14.D2 SRAM1_U_SRAM_WRP7.DATA2 VT1_U_VT_WRP14.OVL2 | length 1209.7
  Top Layer w7: VT1_U_VT_WRP14.OVL2@4366.14,3961.61 4600.61,3961.61 ; v1(4711.02,4278.58) 4711.02,4072.02 4600.61,3961.61 ; SRAM1_U_SRAM_WRP7.DATA2@4921.26,3973.62 4921.26,4125.74 4880,4167 4806.39,4167 4601,3961.61 4600.61,3961.61
  Bottom Layer w7: v1(4711.02,4278.58) OB1_U_OB_WRP14.D2@4711.02,4316.14
OB_D_B19: OB1_U_OB_WRP14.D3 SRAM1_U_SRAM_WRP7.DATA3 VT1_U_VT_WRP14.OVL3 | length 1188.5
  Top Layer w7: VT1_U_VT_WRP14.OVL3@4366.14,3987.2 4505.2,3987.2 ; v1(4547.8,3987.2) 4505.2,3987.2 ; v1(4753,4354) 4558,4159 4558,4040 4505.2,3987.2 ; v1(4952.76,3940) SRAM1_U_SRAM_WRP7.DATA3@4952.76,3973.62
  Bottom Layer w7: v1(4547.8,3987.2) 4625.5,3909.5 4922.26,3909.5 v1(4952.76,3940) ; OB1_U_OB_WRP14.D3@4736.61,4316.14 4736.61,4353.61 4737,4354 v1(4753,4354)
OB_D_B20: OB1_U_OB_WRP14.D4 SRAM1_U_SRAM_WRP7.DATA4 VT1_U_VT_WRP14.OVL4 | length 1410
  Top Layer w7: v1(4329,4013) 4329.2,4012.8 VT1_U_VT_WRP14.OVL4@4366.14,4012.8 v1(4451,4012.8) ; v1(5047,4007) 5047.24,4006.76 SRAM1_U_SRAM_WRP7.DATA4@5047.24,3973.62
  Mid-Layer 1 w7: v1(4329,4013) 4421,4105 4484,4105 ; v1(4451,4012.8) 4451,4072 4484,4105 ; v1(4747,4279) 4573,4105 ; v1(5047,4007) 5032,3992 4655,3992 4654,3993 4654,4072 4621,4105 4573,4105 ; 4484,4105 4573,4105
  Bottom Layer w7: v1(4747,4279) 4753.2,4279 4762.2,4288 OB1_U_OB_WRP14.D4@4762.2,4316.14
OB_D_B21: OB1_U_OB_WRP14.D5 SRAM1_U_SRAM_WRP7.DATA5 VT1_U_VT_WRP14.OVL5 | length 1418.3
  Top Layer w7: VT1_U_VT_WRP14.OVL5@4366.14,4038.39 v1(4404,4038.39) ; v1(5078.74,3940) SRAM1_U_SRAM_WRP7.DATA5@5078.74,3973.62
  Mid-Layer 1 w7: v1(4404,4038.39) 4485.39,3957 5061.74,3957 v1(5078.74,3940)
  Mid-Layer 2 w7: v1(4788,4354) 4780.5,4346.5 4780.5,4172.5 4816,4137 4905.99,4137 5002,4040.99 5002,4016.74 v1(5078.74,3940)
  Bottom Layer w7: OB1_U_OB_WRP14.D5@4787.8,4316.14 4787.8,4353.8 v1(4788,4354)
OB_D_B22: OB1_U_OB_WRP14.D6 SRAM1_U_SRAM_WRP7.DATA6 VT1_U_VT_WRP14.OVL6 | length 1316.1
  Top Layer w7: VT1_U_VT_WRP14.OVL6@4366.14,4063.98 v1(4488,4063.98) ; SRAM1_U_SRAM_WRP7.DATA6@5110.24,3973.62 v1(5110.24,4007.24)
  Mid-Layer 2 w7: v1(4813.39,4278.61) 4838.87,4278.61 v1(5110.24,4007.24)
  Bottom Layer w7: v1(4488,4063.98) 4552.02,4063.98 4691,3925 4851,3925 4903,3977 5079.99,3977 v1(5110.24,4007.24) ; v1(4813.39,4278.61) OB1_U_OB_WRP14.D6@4813.39,4316.14
OB_D_B23: OB1_U_OB_WRP14.D7 SRAM1_U_SRAM_WRP7.DATA7 VT1_U_VT_WRP14.OVL7 | length 1430.3
  Top Layer w7: VT1_U_VT_WRP14.OVL7@4366.14,4089.57 v1(4539,4089.57) ; v1(5141.73,3940) SRAM1_U_SRAM_WRP7.DATA7@5141.73,3973.62 v1(5141.73,4016.65)
  Mid-Layer 1 w7: v1(4539,4089.57) 4657.57,3971 5110.73,3971 v1(5141.73,3940)
  Mid-Layer 2 w7: v1(4823,4354) 4823,4335.38 v1(5141.73,4016.65)
  Bottom Layer w7: v1(4823,4354) 4838.98,4344 OB1_U_OB_WRP14.D7@4838.98,4316.14
OB_D_B24: OB1_U_OB_WRP13.D0 SRAM1_U_SRAM_WRP7.DATA8 VT1_U_VT_WRP13.OVL0 | length 1211
  Top Layer w7: VT1_U_VT_WRP13.OVL0@4366.14,4284.84 v1(4448,4284.84) ; v1(5141.73,4522.42) SRAM1_U_SRAM_WRP7.DATA8@5141.73,4426.38 5141.73,4392 5162.73,4371 v1(5271.95,4371)
  Mid-Layer 1 w7: v1(4448,4284.84) 4499.4,4336.24 4792,4336.24 4805.76,4350 4805.76,4359.91 4932.85,4487 4995,4487 5030.42,4522.42 v1(5141.73,4522.42)
  Bottom Layer w7: v1(5271.95,4371) 5288.98,4353.98 OB1_U_OB_WRP13.D0@5288.98,4316.14
OB_D_B25: OB1_U_OB_WRP13.D1 SRAM1_U_SRAM_WRP7.DATA9 VT1_U_VT_WRP13.OVL1 | length 1549.4
  Top Layer w7: VT1_U_VT_WRP13.OVL1@4366.14,4336.02 v1(4404,4336.02) ; v1(5126.24,4544.63) 5110.24,4528.63 SRAM1_U_SRAM_WRP7.DATA9@5110.24,4426.38 5110.24,4392 5138,4364.24 5138,4258 5211,4185 5298,4185 5315,4168 v1(5315,4046)
  Mid-Layer 1 w7: v1(4404,4336.02) 4441.98,4374 4766.66,4374 4843,4450.34 4843,4491 4873.5,4521.5 5007.5,4521.5 5030.63,4544.63 v1(5126.24,4544.63)
  Bottom Layer w7: OB1_U_OB_WRP13.D1@5314.57,4083.86 5314.57,4046.43 v1(5315,4046)
OB_D_B26: OB1_U_OB_WRP13.D2 SRAM1_U_SRAM_WRP7.DATA10 VT1_U_VT_WRP13.OVL2 | length 1632.1
  Top Layer w7: v1(4314,4361.61) VT1_U_VT_WRP13.OVL2@4366.14,4361.61 ; SRAM1_U_SRAM_WRP7.DATA10@5078.74,4426.38 5078.74,4297 5221.74,4154 v1(5288.98,4154)
  Bottom Layer w7: v1(4314,4361.61) 4314,4289 4341,4262 4852,4262 4956,4158 5266.98,4158 5288.98,4136 ; OB1_U_OB_WRP13.D2@5288.98,4083.86 5288.98,4136 ; v1(5288.98,4154) 5288.98,4136
OB_D_B27: OB1_U_OB_WRP13.D3 SRAM1_U_SRAM_WRP7.DATA11 VT1_U_VT_WRP13.OVL3 | length 1249.2
  Top Layer w7: VT1_U_VT_WRP13.OVL3@4366.14,4387.2 v1(4404,4387.2) ; SRAM1_U_SRAM_WRP7.DATA11@5047.24,4426.38 v1(5047.24,4368) 5047.24,4269 5159.24,4157 5159.24,4101.76 5215,4046 v1(5263,4046)
  Mid-Layer 2 w7: v1(4866,4368) v1(5047.24,4368)
  Bottom Layer w7: v1(4404,4387.2) 4433.3,4416.5 4817.5,4416.5 v1(4866,4368) ; v1(5263,4046) 5263.39,4046.39 OB1_U_OB_WRP13.D3@5263.39,4083.86
OB_D_B28: OB1_U_OB_WRP13.D4 SRAM1_U_SRAM_WRP7.DATA12 VT1_U_VT_WRP13.OVL4 | length 2025.1
  Top Layer w7: v1(4313,4413) 4313.2,4412.8 VT1_U_VT_WRP13.OVL4@4366.14,4412.8 ; SRAM1_U_SRAM_WRP7.DATA12@4952.76,4426.38 4952.76,4396.24 v1(4956,4393)
  Mid-Layer 1 w7: v1(4313,4413) 4434.5,4534.5 4992.5,4534.5 5022,4564 5152,4564 5170,4546 5170,4499 5136,4465 5028,4465 4994,4431 ; v1(4956,4393) 4994,4431 ; v1(5238,4121) 5238,4264 5271,4297 5296,4297 5317,4318 5317,4410 5296,4431 4994,4431
  Bottom Layer w7: OB1_U_OB_WRP13.D4@5237.8,4083.86 5237.8,4120.8 v1(5238,4121)
OB_D_B29: OB1_U_OB_WRP13.D5 SRAM1_U_SRAM_WRP7.DATA13 VT1_U_VT_WRP13.OVL5 | length 1267.6
  Top Layer w7: VT1_U_VT_WRP13.OVL5@4366.14,4438.39 4423.61,4438.39 4523,4339 4702,4339 4735,4372 4838,4372 4861,4349 4880,4349 4921.26,4390.26 ; SRAM1_U_SRAM_WRP7.DATA13@4921.26,4426.38 4921.26,4390.26 ; v1(4937.26,4273.74) 4921.26,4289.74 4921.26,4390.26
  Mid-Layer 2 w7: v1(4937.26,4273.74) 4937.26,4241.74 5173,4006 5194,4006 v1(5212.2,4024.2)
  Bottom Layer w7: v1(5212.2,4024.2) OB1_U_OB_WRP13.D5@5212.2,4083.86
OB_D_B30: OB1_U_OB_WRP13.D6 SRAM1_U_SRAM_WRP7.DATA14 VT1_U_VT_WRP13.OVL6 | length 1227.7
  Top Layer w7: v1(4329,4464) VT1_U_VT_WRP13.OVL6@4366.14,4463.98 ; SRAM1_U_SRAM_WRP7.DATA14@4889.76,4426.38 4889.76,4402.51 v1(4899.51,4392.76)
  Mid-Layer 2 w7: v1(4899.51,4392.76) 4929.76,4423 5040,4423 5066,4397 5066,4262.61 v1(5186.61,4142)
  Bottom Layer w7: v1(4329,4464) 4363.5,4429.5 4862.77,4429.5 v1(4899.51,4392.76) ; OB1_U_OB_WRP13.D6@5186.61,4083.86 v1(5186.61,4142)
OB_D_B31: OB1_U_OB_WRP13.D7 SRAM1_U_SRAM_WRP7.DATA15 VT1_U_VT_WRP13.OVL7 | length 1142.4
  Top Layer w7: VT1_U_VT_WRP13.OVL7@4366.14,4489.57 4403,4489.57 v1(4432.57,4460) ; v1(4858,4460) 4858.27,4459.73 SRAM1_U_SRAM_WRP7.DATA15@4858.27,4426.38
  Mid-Layer 2 w7: v1(4858,4460) 4858,4381.05 4842,4365.05 4918.81,4288.24 4943.52,4288.24 5161,4070.76 v1(5161,4046.26)
  Bottom Layer w7: v1(4432.57,4460) v1(4858,4460) ; v1(5161,4046.26) OB1_U_OB_WRP13.D7@5161.02,4083.86
OB_D_B32: OB1_U_OB_WRP12.D0 SRAM1_U_SRAM_WRP6.DATA0 VT1_U_VT_WRP12.OVL0 | length 888.5
  Top Layer w7: v1(1349,4711.02) 1349,4778.27 1429,4858.27 SRAM1_U_SRAM_WRP6.DATA0@1511.38,4858.27 1552,4858.27 1590.16,4820.11 VT1_U_VT_WRP12.OVL0@1590.16,4341.14
  Bottom Layer w7: v1(1349,4711.02) OB1_U_OB_WRP12.D0@1401.14,4711.02
OB_D_B33: OB1_U_OB_WRP12.D1 SRAM1_U_SRAM_WRP6.DATA1 VT1_U_VT_WRP12.OVL1 | length 1470
  Top Layer w7: v1(1222.42,4669.43) 1252.22,4639.63 1252.22,4383.78 1360,4276 1520,4276 1538.98,4294.98 1538.98,4313.02 ; SRAM1_U_SRAM_WRP6.DATA1@1511.38,4889.76 1548,4889.76 1610,4827.76 1610,4312 1592,4294 1558,4294 1538.98,4313.02 ; VT1_U_VT_WRP12.OVL1@1538.98,4341.14 1538.98,4313.02
  Bottom Layer w7: OB1_U_OB_WRP12.D1@1168.86,4685.43 1206.42,4685.43 v1(1222.42,4669.43)
OB_D_B34: OB1_U_OB_WRP12.D2 SRAM1_U_SRAM_WRP6.DATA2 VT1_U_VT_WRP12.OVL2 | length 1203.9
  Top Layer w7: v1(1131,4711.02) 1146,4726.02 1146,4761 1127,4780 1127,4792 1117.5,4801.5 1117.5,4826.2 1154.3,4863 1296,4863 1334,4825 ; SRAM1_U_SRAM_WRP6.DATA2@1511.38,4921.26 1413.28,4921.26 1334,4841.98 1334,4825 ; VT1_U_VT_WRP12.OVL2@1513.39,4341.14 1513.39,4487.61 1334,4667 1334,4825
  Bottom Layer w7: v1(1131,4711.02) OB1_U_OB_WRP12.D2@1168.86,4711.02
OB_D_B35: OB1_U_OB_WRP12.D3 SRAM1_U_SRAM_WRP6.DATA3 VT1_U_VT_WRP12.OVL3 | length 1765.3
  Top Layer w7: v1(1301,4736.61) v1(1301,4735) 1301,4667 ; v1(1478,4969) 1478,4963.76 1489,4952.76 SRAM1_U_SRAM_WRP6.DATA3@1511.38,4952.76 ; VT1_U_VT_WRP12.OVL3@1487.8,4341.14 1487.8,4465.05 ; 1301,4667 1301,4651.85 1487.8,4465.05 ; 1301,4667 1487.8,4480.2 1487.8,4465.05
  Mid-Layer 2 w7: v1(1301,4735) 1488,4735 1506,4753 1506,5139 1488,5157 1472,5157 1463,5148 1463,4984 v1(1478,4969)
  Bottom Layer w7: OB1_U_OB_WRP12.D3@1168.86,4736.61 v1(1301,4736.61)
OB_D_B36: OB1_U_OB_WRP12.D4 SRAM1_U_SRAM_WRP6.DATA4 VT1_U_VT_WRP12.OVL4 | length 1710
  Top Layer w7: VT1_U_VT_WRP12.OVL4@1462.2,4341.14 v1(1462.2,4379) ; SRAM1_U_SRAM_WRP6.DATA4@1511.38,5047.24 v1(1575,5047.24)
  Mid-Layer 1 w7: v1(1131,4747) 1227,4747 1254,4720 1319,4720 1325,4726 1379,4726 1386,4719 1552,4719 1560,4711 1560,4434 1505,4379 v1(1462.2,4379)
  Mid-Layer 2 w7: v1(1462.2,4379) 1462.2,4437 1575,4549.8 v1(1575,5047.24)
  Bottom Layer w7: v1(1131,4747) 1131,4752 1141.2,4762.2 OB1_U_OB_WRP12.D4@1168.86,4762.2
OB_D_B37: OB1_U_OB_WRP12.D5 SRAM1_U_SRAM_WRP6.DATA5 VT1_U_VT_WRP12.OVL5 | length 1565.1
  Top Layer w7: v1(1436.61,4304) VT1_U_VT_WRP12.OVL5@1436.61,4341.14 ; SRAM1_U_SRAM_WRP6.DATA5@1511.38,5078.74 v1(1574,5078.74) v1(1584.5,5078.74)
  Mid-Layer 2 w7: v1(1436.61,4304) 1605.5,4472.89 1605.5,5047.24 v1(1574,5078.74)
  Bottom Layer w7: OB1_U_OB_WRP12.D5@1168.86,4787.8 1200.8,4787.8 1336,4923 1433,4923 1460,4950 1552,4950 1590,4988 1590,5073.24 v1(1584.5,5078.74)
OB_D_B38: OB1_U_OB_WRP12.D6 SRAM1_U_SRAM_WRP6.DATA6 VT1_U_VT_WRP12.OVL6 | length 1379.8
  Top Layer w7: v1(1132,4814) 1140,4806 1140,4790 1411.02,4518.98 VT1_U_VT_WRP12.OVL6@1411.02,4341.14 ; v1(1361.24,5110.24) SRAM1_U_SRAM_WRP6.DATA6@1511.38,5110.24
  Bottom Layer w7: v1(1132,4814) 1132.61,4813.39 OB1_U_OB_WRP12.D6@1168.86,4813.39 1202.39,4813.39 1221,4832 1221,4872 1173.24,4919.76 1101.24,4919.76 1093,4928 1093,4944 1101,4952 1203,4952 v1(1361.24,5110.24)
OB_D_B39: OB1_U_OB_WRP12.D7 SRAM1_U_SRAM_WRP6.DATA7 VT1_U_VT_WRP12.OVL7 | length 2012.3
  Top Layer w7: v1(1385.43,4304) VT1_U_VT_WRP12.OVL7@1385.43,4341.14 ; v1(1478,5141.73) SRAM1_U_SRAM_WRP6.DATA7@1511.38,5141.73 v1(1605,5141.73)
  Mid-Layer 2 w7: v1(1206,4838.98) 1221.02,4854 1444.27,4854 1465.27,4833 1465.27,4806.27 1451,4792 1451,4760 1463,4748 1481,4748 1493,4760 1493,5126.73 v1(1478,5141.73) ; v1(1385.43,4304) 1409.43,4280 1461,4280 1618.5,4437.5 1618.5,5128.23 v1(1605,5141.73)
  Bottom Layer w7: OB1_U_OB_WRP12.D7@1168.86,4838.98 v1(1206,4838.98)
OB_D_B40: OB1_U_OB_WRP11.D0 SRAM1_U_SRAM_WRP6.DATA8 VT1_U_VT_WRP11.OVL0 | length 1230.8
  Top Layer w7: v1(1025,5141.73) SRAM1_U_SRAM_WRP6.DATA8@1058.62,5141.73 ; v1(1180,4304.16) 1190.16,4304.16 VT1_U_VT_WRP11.OVL0@1190.16,4341.14
  Mid-Layer 2 w7: v1(1025,5141.73) 1178.5,4988.23 1178.5,4409.77 1195.5,4392.77 1195.5,4319.66 v1(1180,4304.16)
  Bottom Layer w7: v1(1025,5141.73) 1051.02,5167.76 1051.02,5220 1120,5288.98 OB1_U_OB_WRP11.D0@1168.86,5288.98
OB_D_B41: OB1_U_OB_WRP11.D1 SRAM1_U_SRAM_WRP6.DATA9 VT1_U_VT_WRP11.OVL1 | length 1435.1
  Top Layer w7: v1(1058.03,4459.95) 1138.98,4379 VT1_U_VT_WRP11.OVL1@1138.98,4341.14 ; SRAM1_U_SRAM_WRP6.DATA9@1058.62,5110.24 1091.76,5110.24 v1(1092,5110)
  Mid-Layer 2 w7: v1(1058.03,4459.95) 1058.03,5073.97 1010,5122 1010,5152 1019,5161 1027.7,5161 1078.7,5110 v1(1092,5110)
  Bottom Layer w7: v1(1092,5110) 1209,5110 1335,5236 1335,5298.57 1351,5314.57 OB1_U_OB_WRP11.D1@1401.14,5314.57
OB_D_B42: OB1_U_OB_WRP11.D2 SRAM1_U_SRAM_WRP6.DATA10 VT1_U_VT_WRP11.OVL2 | length 1313.1
  Top Layer w7: v1(1025,5078.74) SRAM1_U_SRAM_WRP6.DATA10@1058.62,5078.74 1228.76,5078.74 v1(1439,5288.98) ; v1(1042,4435.89) 1113.39,4364.5 VT1_U_VT_WRP11.OVL2@1113.39,4341.14
  Mid-Layer 2 w7: v1(1025,5078.74) 1042,5061.74 v1(1042,4435.89)
  Bottom Layer w7: OB1_U_OB_WRP11.D2@1401.14,5288.98 v1(1439,5288.98)
OB_D_B43: OB1_U_OB_WRP11.D3 SRAM1_U_SRAM_WRP6.DATA11 VT1_U_VT_WRP11.OVL3 | length 1660.4
  Top Layer w7: v1(1087.8,4304) VT1_U_VT_WRP11.OVL3@1087.8,4341.14 ; v1(1092.24,5047.24) SRAM1_U_SRAM_WRP6.DATA11@1058.62,5047.24 1033.76,5047.24 1010,5071 1010,5352 1030,5372 1129,5372 1162,5339 1288.39,5339 v1(1364,5263.39)
  Mid-Layer 2 w7: v1(1087.8,4304) 1165.5,4381.7 1165.5,4973.99 v1(1092.24,5047.24)
  Bottom Layer w7: v1(1364,5263.39) OB1_U_OB_WRP11.D3@1401.14,5263.39
OB_D_B44: OB1_U_OB_WRP11.D4 SRAM1_U_SRAM_WRP6.DATA12 VT1_U_VT_WRP11.OVL4 | length 1230
  Top Layer w7: SRAM1_U_SRAM_WRP6.DATA12@1058.62,4952.76 1121.24,4952.76 ; VT1_U_VT_WRP11.OVL4@1062.2,4341.14 1062.2,4379 1025,4416.2 1025,4503 1114,4592 1114,4777 1104.5,4786.5 1104.5,4831.59 1130,4857.09 1130,4944 1121.24,4952.76 ; v1(1439,5237.8) 1439,5217.77 1173.99,4952.76 1121.24,4952.76
  Bottom Layer w7: OB1_U_OB_WRP11.D4@1401.14,5237.8 v1(1439,5237.8)
OB_D_B45: OB1_U_OB_WRP11.D5 SRAM1_U_SRAM_WRP6.DATA13 VT1_U_VT_WRP11.OVL5 | length 1381.3
  Top Layer w7: VT1_U_VT_WRP11.OVL5@1036.61,4341.14 v1(1036.61,4379) ; v1(1092.24,4905.26) 1092.24,4912 1087.61,4916.63 ; v1(1108.24,4937.26) 1087.61,4916.63 ; 1087.61,4916.63 1082.98,4921.26 SRAM1_U_SRAM_WRP6.DATA13@1058.62,4921.26 1087.61,4916.63
  Mid-Layer 2 w7: v1(1036.61,4379) 1077,4419.39 1077,4890.02 v1(1092.24,4905.26)
  Bottom Layer w7: v1(1108.24,4937.26) 1380.26,4937.26 1520,5077 1520,5157 1464.8,5212.2 OB1_U_OB_WRP11.D5@1401.14,5212.2
OB_D_B46: OB1_U_OB_WRP11.D6 SRAM1_U_SRAM_WRP6.DATA14 VT1_U_VT_WRP11.OVL6 | length 1187
  Top Layer w7: VT1_U_VT_WRP11.OVL6@1011.02,4341.14 v1(1011,4379) ; v1(1025,4932) v1(1025,4889.76) SRAM1_U_SRAM_WRP6.DATA14@1058.62,4889.76
  Mid-Layer 2 w7: v1(1011,4379) 1025,4393 v1(1025,4889.76)
  Bottom Layer w7: v1(1025,4932) 1010,4947 1010,5024 1058.23,5072.23 1193.2,5072.23 1307.59,5186.61 OB1_U_OB_WRP11.D6@1401.14,5186.61
OB_D_B47: OB1_U_OB_WRP11.D7 SRAM1_U_SRAM_WRP6.DATA15 VT1_U_VT_WRP11.OVL7 | length 1322
  Top Layer w7: v1(985.43,4300.57) VT1_U_VT_WRP11.OVL7@985.43,4341.14 ; SRAM1_U_SRAM_WRP6.DATA15@1058.62,4858.27 1076.27,4858.27 v1(1096,4878)
  Mid-Layer 2 w7: v1(985.43,4300.57) 1006,4280 1046,4280 1062,4296 1062,4313 1151,4402 1151,4823 v1(1096,4878)
  Bottom Layer w7: v1(1096,4878) 1077,4897 1077,4969 1088,4980 1156,4980 1337.02,5161.02 OB1_U_OB_WRP11.D7@1401.14,5161.02
OB_D_B48: OB1_U_OB_WRP10.D0 SRAM1_U_SRAM_WRP5.DATA0 VT1_U_VT_WRP10.OVL0 | length 1123.9
  Top Layer w7: v1(367.5,4783.5) 442.27,4858.27 SRAM1_U_SRAM_WRP5.DATA0@586.38,4858.27 v1(688,4858.27) ; v1(788,4304) 790.16,4306.16 VT1_U_VT_WRP10.OVL0@790.16,4341.14
  Mid-Layer 2 w7: v1(688,4858.27) 788,4758.27 v1(788,4304)
  Bottom Layer w7: v1(367.5,4783.5) 439.98,4711.02 OB1_U_OB_WRP10.D0@476.14,4711.02
OB_D_B49: OB1_U_OB_WRP10.D1 SRAM1_U_SRAM_WRP5.DATA1 VT1_U_VT_WRP10.OVL1 | length 1363.1
  Top Layer w7: v1(281,4669) 534,4416 534,4312 542,4304 730.98,4304 738.98,4312 VT1_U_VT_WRP10.OVL1@738.98,4341.14 ; v1(553,4906) 561,4898 561,4889.76 SRAM1_U_SRAM_WRP5.DATA1@586.38,4889.76
  Bottom Layer w7: OB1_U_OB_WRP10.D1@243.86,4685.43 OB1_U_OB_WRP10.D1@251,4685.43 ; v1(281,4669) 267.43,4669 OB1_U_OB_WRP10.D1@251,4685.43 ; v1(553,4906) 560,4906 570,4896 570,4680 554,4664 288.43,4664 267,4685.43 OB1_U_OB_WRP10.D1@251,4685.43
OB_D_B50: OB1_U_OB_WRP10.D2 SRAM1_U_SRAM_WRP5.DATA2 VT1_U_VT_WRP10.OVL2 | length 1250.6
  Top Layer w7: v1(469.26,4921.26) SRAM1_U_SRAM_WRP5.DATA2@586.38,4921.26 v1(620,4921.26) ; VT1_U_VT_WRP10.OVL2@713.39,4341.14 v1(713.39,4389)
  Mid-Layer 1 w7: v1(181,4711.02) 181,4763 202,4784 332,4784 v1(469.26,4921.26)
  Mid-Layer 2 w7: v1(620,4921.26) 605,4906.26 605,4497.39 v1(713.39,4389)
  Bottom Layer w7: v1(181,4711.02) OB1_U_OB_WRP10.D2@243.86,4711.02
OB_D_B51: OB1_U_OB_WRP10.D3 SRAM1_U_SRAM_WRP5.DATA3 VT1_U_VT_WRP10.OVL3 | length 1132.1
  Top Layer w7: v1(281.42,4736.61) 438.13,4736.61 687.8,4486.95 VT1_U_VT_WRP10.OVL3@687.8,4341.14 ; v1(512,4952.76) SRAM1_U_SRAM_WRP5.DATA3@586.38,4952.76
  Mid-Layer 1 w7: v1(285.39,4750) 369,4750 512,4893 v1(512,4952.76)
  Bottom Layer w7: OB1_U_OB_WRP10.D3@243.86,4736.61 272,4736.61 ; v1(281.42,4736.61) 272,4736.61 ; v1(285.39,4750) 272,4736.61
OB_D_B52: OB1_U_OB_WRP10.D4 SRAM1_U_SRAM_WRP5.DATA4 VT1_U_VT_WRP10.OVL4 | length 2027.2
  Top Layer w7: SRAM1_U_SRAM_WRP5.DATA4@586.38,5047.24 v1(620,5047.24) ; VT1_U_VT_WRP10.OVL4@662.2,4341.14 v1(662.2,4395) v1(662.2,4409.5)
  Mid-Layer 2 w7: v1(620,5047.24) 617.5,5044.74 617.5,4946.5 635,4929 635,4645 728,4552 728,4378.8 720,4370.8 686.41,4370.8 v1(662.2,4395)
  Bottom Layer w7: OB1_U_OB_WRP10.D4@243.86,4762.2 206,4762.2 170.2,4798 107,4798 85,4776 85,4680 173,4592 290,4592 330,4552 330,4418 324,4412 324,4364 379,4364 380,4365 380,4376 413.5,4409.5 v1(662.2,4409.5)
OB_D_B53: OB1_U_OB_WRP10.D5 SRAM1_U_SRAM_WRP5.DATA5 VT1_U_VT_WRP10.OVL5 | length 1674.9
  Top Layer w7: v1(281.42,4803.8) 281.42,4787.8 266,4772.38 266,4712.94 272.82,4706.11 433.94,4706.11 636.61,4503.44 VT1_U_VT_WRP10.OVL5@636.61,4341.14 ; v1(552.97,5063) 552.97,5078.74 SRAM1_U_SRAM_WRP5.DATA5@586.38,5078.74
  Mid-Layer 1 w7: v1(281.42,4803.8) 267.2,4803.8 231,4840 231,4968 198,5001 85,5001 85,5025 123,5063 v1(552.97,5063)
  Bottom Layer w7: OB1_U_OB_WRP10.D5@243.86,4787.8 272,4787.8 281.42,4797.21 v1(281.42,4803.8)
OB_D_B54: OB1_U_OB_WRP10.D6 SRAM1_U_SRAM_WRP5.DATA6 VT1_U_VT_WRP10.OVL6 | length 2058.4
  Top Layer w7: SRAM1_U_SRAM_WRP5.DATA6@586.38,5110.24 620,5110.24 ; VT1_U_VT_WRP10.OVL6@611.02,4341.14 v1(611.02,4395) ; v1(620,5095) 620,5110.24 ; v1(637.82,5092.41) 620,5110.24
  Mid-Layer 1 w7: v1(206,4813.39) 183,4836.39 183,4938 144,4977 80,4977 72,4985 72,5096 104,5128 218,5128 254.07,5091.93 541.5,5091.93 544.57,5095 v1(620,5095)
  Mid-Layer 2 w7: v1(611.02,4395) 652.02,4354 728,4354 741,4367 741,4574 656,4659 656,4892 679,4915 679,5051.24 v1(637.82,5092.41)
  Bottom Layer w7: v1(206,4813.39) OB1_U_OB_WRP10.D6@243.86,4813.39
OB_D_B55: OB1_U_OB_WRP10.D7 SRAM1_U_SRAM_WRP5.DATA7 VT1_U_VT_WRP10.OVL7 | length 1441.9
  Top Layer w7: v1(280.04,4830.94) 253,4803.9 253,4705 272,4686 399,4686 585.43,4499.57 ; v1(552.76,5141.73) SRAM1_U_SRAM_WRP5.DATA7@586.38,5141.73 ; VT1_U_VT_WRP10.OVL7@585.43,4341.14 585.43,4499.57 ; v1(585.43,4515) 585.43,4499.57
  Mid-Layer 2 w7: v1(552.76,5141.73) 585.43,5109.05 v1(585.43,4515)
  Bottom Layer w7: OB1_U_OB_WRP10.D7@243.86,4838.98 272,4838.98 v1(280.04,4830.94)
OB_D_B56: OB1_U_OB_WRP9.D0 SRAM1_U_SRAM_WRP5.DATA8 VT1_U_VT_WRP9.OVL0 | length 1417
  Top Layer w7: SRAM1_U_SRAM_WRP5.DATA8@133.62,5141.73 268.35,5141.73 311.61,5185 311.61,5258.36 v1(281,5288.98) ; v1(385,4304) 390.16,4309.16 VT1_U_VT_WRP9.OVL0@390.16,4341.14
  Mid-Layer 2 w7: v1(281,5288.98) 385,5184.98 v1(385,4304)
  Bottom Layer w7: OB1_U_OB_WRP9.D0@243.86,5288.98 v1(281,5288.98)
OB_D_B57: OB1_U_OB_WRP9.D1 SRAM1_U_SRAM_WRP5.DATA9 VT1_U_VT_WRP9.OVL1 | length 1282.8
  Top Layer w7: SRAM1_U_SRAM_WRP5.DATA9@133.62,5110.24 166.76,5110.24 ; v1(182,5095) 166.76,5110.24 ; VT1_U_VT_WRP9.OVL1@338.98,4341.14 v1(338.98,4379) ; v1(436,5314.57) 436,5288.59 257.65,5110.24 166.76,5110.24
  Mid-Layer 2 w7: v1(182,5095) 338.98,4938.02 v1(338.98,4379)
  Bottom Layer w7: v1(436,5314.57) OB1_U_OB_WRP9.D1@476.14,5314.57
OB_D_B58: OB1_U_OB_WRP9.D2 SRAM1_U_SRAM_WRP5.DATA10 VT1_U_VT_WRP9.OVL2 | length 1726.4
  Top Layer w7: v1(100,5062.74) 100,5069.48 109.26,5078.74 ; v1(100,5098) 100,5088 109.26,5078.74 ; SRAM1_U_SRAM_WRP5.DATA10@133.62,5078.74 109.26,5078.74 ; v1(251,4441.39) 313.39,4379 VT1_U_VT_WRP9.OVL2@313.39,4341.14
  Mid-Layer 2 w7: v1(100,5062.74) 251,4911.74 v1(251,4441.39) ; v1(100,5098) 130,5128 208,5128 240,5160 240,5277 272,5309 326.17,5309 417,5218.17 417,5155 428,5144 460,5144 476,5160 476,5234.98 v1(530,5288.98)
  Bottom Layer w7: OB1_U_OB_WRP9.D2@476.14,5288.98 v1(530,5288.98)
OB_D_B59: OB1_U_OB_WRP9.D3 SRAM1_U_SRAM_WRP5.DATA11 VT1_U_VT_WRP9.OVL3 | length 1281.6
  Top Layer w7: SRAM1_U_SRAM_WRP5.DATA11@133.62,5047.24 v1(167.24,5047.24) 215.86,5047.24 432,5263.39 v1(439,5263.39) ; v1(287.8,4304) VT1_U_VT_WRP9.OVL3@287.8,4341.14
  Mid-Layer 2 w7: v1(167.24,5047.24) 311,4903.49 311,4327.2 v1(287.8,4304)
  Bottom Layer w7: v1(439,5263.39) OB1_U_OB_WRP9.D3@476.14,5263.39
OB_D_B60: OB1_U_OB_WRP9.D4 SRAM1_U_SRAM_WRP5.DATA12 VT1_U_VT_WRP9.OVL4 | length 1360.9
  Top Layer w7: v1(100,4952.76) SRAM1_U_SRAM_WRP5.DATA12@133.62,4952.76 362.76,4952.76 468,5058 468,5192 v1(514,5238) ; VT1_U_VT_WRP9.OVL4@262.2,4341.14 v1(262.2,4379)
  Mid-Layer 2 w7: v1(100,4952.76) 157.24,4952.76 234,4876 234,4407.2 v1(262.2,4379)
  Bottom Layer w7: OB1_U_OB_WRP9.D4@476.14,5237.8 513.8,5237.8 v1(514,5238)